# EAGLE board pcb_univ_3-(1-3-5)-x-x-rev2 (EAGLE 5.11)
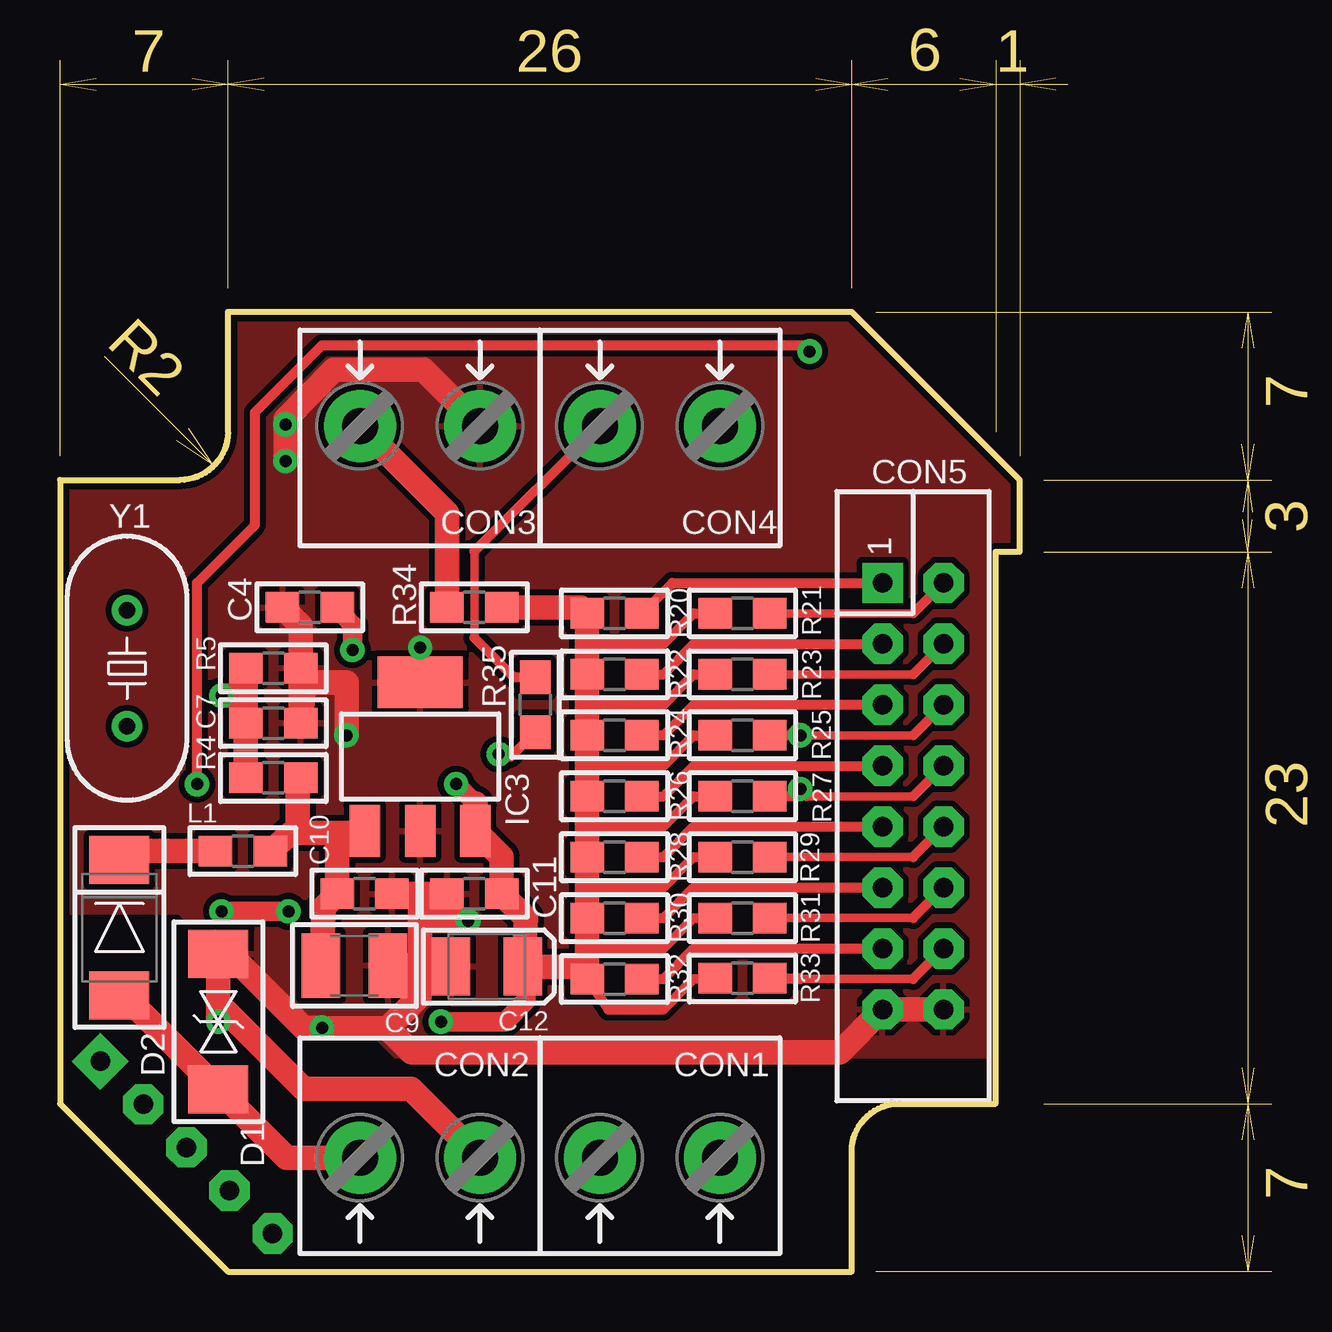
[diagram p0: board, top side]
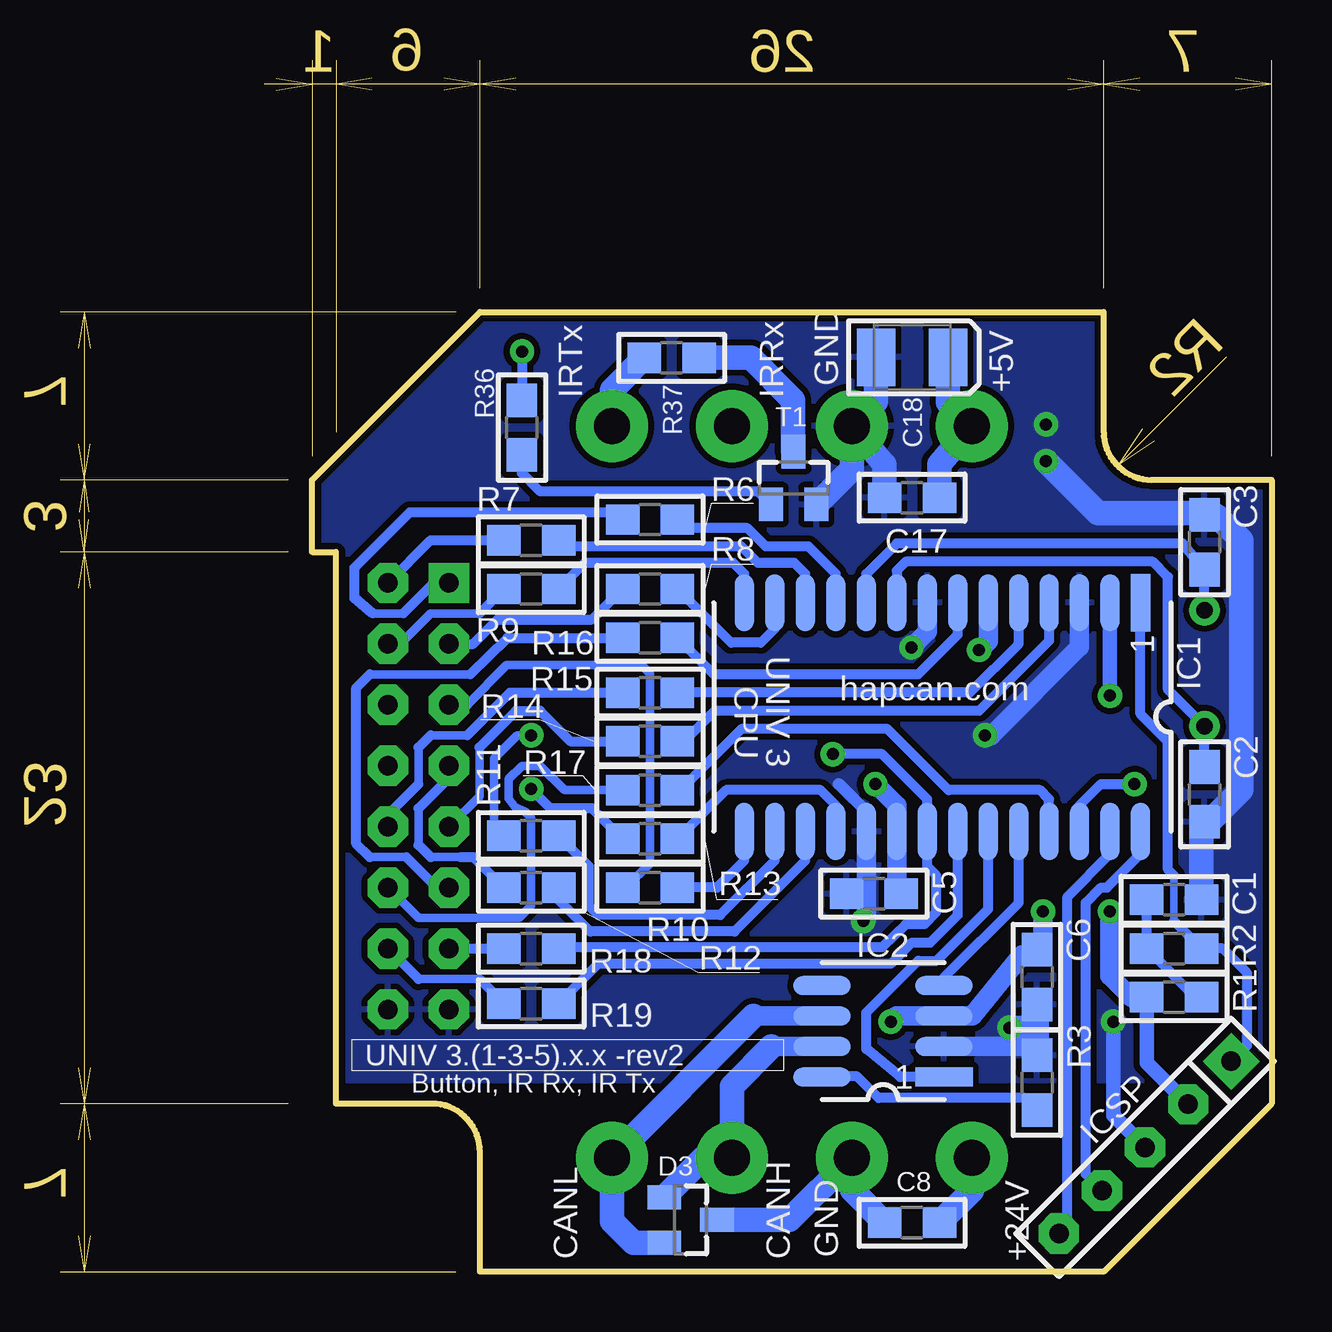
[diagram p1: board, bottom side, seen from below]

Size 50.5 x 50.5 mm. Coordinates in mm from the lower left corner, seen from the top.
Outline: 6.37,33.63 1.86,38.13
Outline: 6.37,33.63 4.87,34.63
Outline: 6.37,33.63 5.37,35.13
Outline: 0,34 0,49.5
Outline: 0,49.5 0,50.5
Outline: 0,49.5 39,49.5
Outline: 39,49.5 40,49.5
Outline: 40,50.5 40,49.5
Outline: 40,49.5 40,34
Outline: 33,41 33,50.5
Outline: 7,41 7,50.5
Outline: 0,49.5 1.5,49.75
Outline: 0,49.5 1.5,49.25
Outline: 8.5,49.75 5.5,49.25
Outline: 5.5,49.75 8.5,49.25
Outline: 31.5,49.25 34.5,49.75
Outline: 31.5,49.75 34.5,49.25
Outline: 34,40 49.5,40
Outline: 49.5,40 50.5,40
Outline: 49.5,40 49.5,33
Outline: 49.5,33 49.5,30
Outline: 49.5,30 49.5,0
Outline: 50.5,0 49.5,0
Outline: 49.5,0 34,0
Outline: 41,7 50.5,7
Outline: 41,33 49.5,33
Outline: 49.5,33 50.5,33
Outline: 49.5,40 49.75,38.5
Outline: 49.5,40 49.25,38.5
Outline: 49.5,33 49.25,34.5
Outline: 49.75,34.5 49.5,33
Outline: 49.25,8.5 49.75,5.5
Outline: 49.75,8.5 49.25,5.5
Outline: 49.25,1.5 49.5,0
Outline: 49.75,1.5 49.5,0
Outline: 41,30 49.5,30
Outline: 49.5,30 50.5,30
Outline: 49.5,30 49.75,28.5
Outline: 49.5,30 49.25,28.5
Outline: 49.5,33 49.3,31.65
Outline: 49.5,33 49.7,31.65
Outline: 49.5,30 49.7,31.35
Outline: 49.5,30 49.3,31.35
Outline: 39,50.5 39,49.5
Outline: 39,49.5 39,35
Outline: 37.5,49.75 39,49.5
Outline: 37.5,49.25 39,49.5
Outline: 40,49.5 42,49.5
Outline: 41.5,49.75 40,49.5
Outline: 41.5,49.25 40,49.5
Outline: 40,30 40,33 33,40 7,40 7,35 arc-90 5,33 0,33 0,7 7,0 33,0 33,5 arc-90 35,7 39,7 39,30 40,30
Copper layers (1*16): Top 0.035mm / dielectric 1.5mm / Bottom 0.035mm
Design rules "hapcan_drc *": minimum track width 10mil, minimum drill 0.5mm, track to track 10mil, track to pad 10mil, pad to pad 10mil, via to via 10mil, smd to smd 0mil, copper to edge 10mil, drill to drill 8mil, minimum pad ring 10mil, minimum via ring 10mil, stop-mask expansion 4mil, vias tented up to drill 0mil, thermal gap 10mil

## Footprints (pad centres in the part's own frame; a part is rotated, then mirrored left to right if it is on the bottom)
CONNECTOR-16PIN = drill 0.813 pad 1.676 square: 1 -8.89,-1.27 | drill 0.813 pad 1.676 octagon: 2 -8.89,1.27; 3 -6.35,-1.27; 4 -6.35,1.27; 5 -3.81,-1.27; 6 -3.81,1.27; 7 -1.27,-1.27; 8 -1.27,1.27; 9 1.27,-1.27; 10 1.27,1.27; 11 3.81,-1.27; 12 3.81,1.27; 13 6.35,-1.27; 14 6.35,1.27; 15 8.89,-1.27; 16 8.89,1.27
0805 = smd 1.397 x 1.27: 1 -1.143,0; 2 1.143,0
1210 = smd 1.6 x 2.7: 1 -1.4,0; 2 1.4,0
SMC_B = smd 1.6 x 2.4: + -1.5,0; - 1.5,0
ARK2-9MM = drill 1.5 pad 3 round: 1 -2.5,0; 2 2.5,0
DO-214_TRANSIL2@1 = smd 2 x 2.5: A 2.82,0; C -2.82,0
DO-214 = smd 2 x 2.5: A 2.82,0; C -2.82,0
SOT-23 = smd 1 x 1.4: 1 -0.95,-1.1; 2 0.95,-1.1; 3 0,1.1
UNIV3CPU = smd 2.4 x 0.8: 1 -4.763,8.255; 2 -4.763,6.985; 3 -4.763,5.715; 4 -4.763,4.445; 5 -4.763,3.175; 6 -4.763,1.905; 7 -4.763,0.635; 8 -4.763,-0.635; 9 -4.763,-1.905; 10 -4.763,-3.175; 11 -4.763,-4.445; 12 -4.763,-5.715; 13 -4.763,-6.985; 14 -4.763,-8.255; 15 4.763,-8.255; 16 4.763,-6.985; 17 4.763,-5.715; 18 4.763,-4.445; 19 4.763,-3.175; 20 4.763,-1.905; 21 4.763,-0.635; 22 4.763,0.635; 23 4.763,1.905; 24 4.763,3.175; 25 4.763,4.445; 26 4.763,5.715; 27 4.763,6.985; 28 4.763,8.255
SO-08 = smd 2.4 x 0.8: 1 -2.54,1.905; 2 -2.54,0.635; 3 -2.54,-0.635; 4 -2.54,-1.905; 5 2.54,-1.905; 6 2.54,-0.635; 7 2.54,0.635; 8 2.54,1.905
SOT-223 = smd 1.27 x 2.159: 1 -2.311,-3.099; 2 0,-3.099; 3 2.311,-3.099 | smd 3.556 x 2.159: 4 0,3.099
SIP-5 = drill 0.813 pad 1.676 square: 1 -5.08,0 | drill 0.813 pad 1.676 octagon: 2 -2.54,0; 3 0,0; 4 2.54,0; 5 5.08,0
HC49/S = drill 0.7 pad 1.27 round: 1 -2.413,0; 2 2.413,0

## Placement (x,y rotation side)
-  CONNECTOR-16PIN  [CONNECTOR-16PIN]  35.56,19.81 270 top
C1  100n  [0805]  4.06,15.49 0 bottom
C2  22p  [0805]  2.79,19.89 270 bottom
C3  22p  [0805]  2.79,30.4 90 bottom
C4  10u/6V  [0805]  10.41,27.69 180 top
C5  100n  [0805]  16.57,15.75 180 bottom
C6  100n  [0805]  9.78,12.27 270 bottom
C7  100n  [0805]  8.89,22.86 0 top
C8  100n  [0805]  14.99,2.03 180 bottom
C9  10u/50V  [1210]  12.27,12.75 0 top
C10  100n  [0805]  12.7,15.75 0 top
C11  100n  [0805]  17.27,15.75 180 top
C12  10u/6V  [SMC_B]  17.79,12.72 180 top
C17  100n  [0805]  14.99,32.26 180 bottom
C18  4u7/6V  [SMC_B]  14.98,38.11 180 bottom
CON1  TERMINAL-2  [ARK2-9MM]  25,4.75 180 top
CON2  TERMINAL-2  [ARK2-9MM]  15,4.75 180 top
CON3  TERMINAL-2  [ARK2-9MM]  15,35.25 0 top
CON4  TERMINAL-2  [ARK2-9MM]  25,35.25 0 top
D1  P6SMB33CA  [DO-214_TRANSIL2@1]  6.6,10.41 270 top
D2  S1D  [DO-214]  2.48,14.33 270 top
D3  PESD2CAN  [SOT-23]  24.22,2.15 270 bottom
IC1  UNIV 3 (CPU)  [UNIV3CPU]  13.72,23.11 270 bottom
IC2  MCP2551  [SO-08]  16.19,10.01 180 bottom
IC3  MCP1790  [SOT-223]  15.01,21.46 0 top
ICSP  [SIP-5]  5.27,5.17 225 bottom
L1  BLM21A102SPT  [0805]  7.62,17.53 180 top
R1  10k  [0805]  4.06,11.43 0 bottom
R2  470R  [0805]  4.06,13.46 0 bottom
R3  4k7  [0805]  9.78,7.87 270 bottom
R4  51k 1%  [0805]  8.89,20.57 180 top
R5  10k 1%  [0805]  8.89,25.15 180 top
R6  470R  [0805]  25.91,31.34 180 bottom
R7  470R  [0805]  30.86,30.48 180 bottom
R8  470R  [0805]  25.91,28.45 180 bottom
R9  470R  [0805]  30.86,28.45 180 bottom
R10  470R  [0805]  25.91,16 180 bottom
R11  470R  [0805]  30.86,18.16 180 bottom
R12  470R  [0805]  30.86,16 180 bottom
R13  470R  [0805]  25.91,18.03 180 bottom
R14  470R  [0805]  25.91,22.1 180 bottom
R15  470R  [0805]  25.91,24.13 180 bottom
R16  470R  [0805]  25.91,26.42 180 bottom
R17  470R  [0805]  25.91,20.07 180 bottom
R18  470R / **R  [0805]  30.86,13.46 180 bottom
R19  470R / 0R  [0805]  30.86,11.18 180 bottom
R20  10k  [0805]  23.11,27.43 0 top
R21  10k  [0805]  28.45,27.43 0 top
R22  10k  [0805]  23.11,24.89 0 top
R23  10k  [0805]  28.45,24.89 0 top
R24  10k  [0805]  23.11,22.35 0 top
R25  10k  [0805]  28.45,22.35 0 top
R26  10k  [0805]  23.11,19.81 0 top
R27  10k  [0805]  28.45,19.81 0 top
R28  10k  [0805]  23.11,17.27 0 top
R29  10k  [0805]  28.45,17.27 0 top
R30  10k  [0805]  23.11,14.73 0 top
R31  10k  [0805]  28.45,14.73 0 top
R32  10k / **R  [0805]  23.11,12.19 0 top
R33  10k / 2k2  [0805]  28.45,12.22 0 top
R34  100R  [0805]  17.27,27.69 180 top
R35  0R / **R  [0805]  19.81,23.62 90 top
R36  470R  [0805]  31.24,35.18 270 bottom
R37  0R  [0805]  25.01,38.08 180 bottom
T1  BC817C  [SOT-23]  19.92,33.08 0 bottom
Y1  8MHz  [HC49/S]  2.79,25.15 90 top

## Library data of the parts
- C1-C12 C17 C18 CON1-CON4 D1-D3 IC1-IC3 ICSP L1 R1-R37 T1 Y1 = HAPCAN_devices - UNIV3

## Nets
+5V: C5.1 C6.1 C11.1 C12.+ IC1.20 IC2.3 IC3.3 ICSP.2 R1.1 R20.1 R21.1 R22.1 R23.1 R24.1 R25.1 R26.1 R27.1 R28.1 R29.1 R30.1 R31.1 R32.1 R33.1 R34.1
GND: -.15 -.16 C1.2 C2.2 C3.2 C4.2 C5.2 C6.2 C7.2 C8.2 C9.2 C10.2 C11.2 C12.- C17.2 C18.- CON2.1 CON3.2 D1.C D3.3 IC1.3 IC1.8 IC1.19 IC2.2 IC3.2 IC3.4 ICSP.3 R3.1 R5.1 T1.2
N$1: IC1.26 R36.1
N$2: IC1.24 IC2.4
N$3: IC1.23 IC2.1
N$4: CON4.2 R37.2
N$5: -.1 R6.2 R20.2
N$6: -.3 R8.2 R22.2
N$7: C1.1 R1.2 R2.1
N$8: IC1.1 ICSP.1 R2.2
N$9: CON1.2 D3.1 IC2.7
N$10: IC1.28 ICSP.4
N$11: IC1.22 R19.1
N$12: IC2.8 R3.2
N$13: -.9 R14.2 R28.2
N$14: IC1.27 ICSP.5
N$15: C3.1 IC1.10 Y1.2
N$16: C7.1 IC1.2 R4.2 R5.2
N$17: C9.1 C10.1 IC3.1 L1.1 R4.1
N$18: IC1.21 R18.1 R35.1
N$19: -.2 R7.2 R21.2
N$20: IC1.25 R17.1
N$21: -.4 R9.2 R23.2
N$22: IC1.14 R9.1
N$23: -.6 R11.2 R25.2
N$24: -.7 R12.2 R26.2
N$25: IC1.11 R6.1
N$26: IC1.12 R7.1
N$27: IC1.13 R8.1
N$28: -.10 R15.2 R29.2
N$29: IC1.15 R10.1
N$30: IC1.7 R16.1
N$31: -.5 R10.2 R24.2
N$32: -.8 R13.2 R27.2
N$33: IC1.5 R15.1
N$34: IC1.4 R14.1
N$35: R37.1 T1.3
N$36: -.11 R16.2 R30.2
N$37: C17.1 C18.+ CON3.1 R34.2
N$38: -.12 R17.2 R31.2
N$40: C2.1 IC1.9 Y1.1
N$41: -.14 R19.2 R33.2
N$42: CON1.1 D3.2 IC2.6
N$43: R36.2 T1.1
N$44: CON4.1 R35.2
N$45: IC1.16 R11.1
N$46: IC1.17 R12.1
N$47: IC1.18 R13.1
N$48: -.13 R18.2 R32.2
N$56: C4.1 IC1.6
N$64: C8.1 CON2.2 D1.A D2.A
N$67: D2.C L1.2

## Tracks (layer width: path | path; a pad name or v marks a point on that pad's centre or on a via)
+5V  (via drill 0.5 pad 1.02)
  Top 0.406: R21.1 26.42,27.43 25.15,26.16 21.97,26.16 | R23.1 26.42,24.89 25.15,23.62 21.97,23.62 | R25.1 26.42,22.35 25.15,21.08 21.97,21.08 | R27.1 26.42,19.81 25.15,18.54 21.97,18.54 | R29.1 26.42,17.27 25.15,16 21.97,16 | R31.1 26.42,14.73 25.15,13.46 21.97,13.46 | R33.1 26.42,12.19 25.15,10.92 22.86,10.92 R32.1
  Top 0.813: v15.88,10.41 18.54,10.41 19.43,11.3 19.43,12.7 C12.+ | 17.32,19.51 v16.51,20.32 | v6.73,15.01 v9.53,15.01 | IC3.3 17.32,19.51
  Top 1.016: C12.+ 19.42,14.74 C11.1 18.41,17.27 IC3.3 | R34.1 21.72,27.69 R20.1 21.97,26.16 R22.1 21.97,23.62 R24.1 21.97,21.08 R26.1 21.97,18.54 R28.1 21.97,16 R30.1 21.97,13.46 R32.1 21.97,12.7 19.43,12.7 | 17.32,19.51
  Bottom 0.406: 15.62,15.74 C5.1 | R1.1 5.84,11.43
  Bottom 0.61: ICSP.2 5.21,8.7 R1.1
  Bottom 0.813: 15.62,15.74 IC1.20 15.62,19.43 v16.51,20.32 | v15.88,10.41 15.64,10.65 IC2.3 12.46,10.65 10.41,13.21 9.96,13.21 C6.1 | v6.73,15.01 6.73,12.32 5.84,11.43 | C6.1 9.75,13.36 | v9.53,15.01 9.53,13.64 C6.1
GND  (via drill 0.5 pad 0.81, 0.5 pad 1.02)
  Top 0.406: 6.63,13.21 7.11,13.21
  Top 0.813: 15.01,14.48 15.07,14.54
  Top 1.016: CON2.1 14.63,7.62 10.16,7.62 6.6,11.18 | 14.99,12.75 C9.2 | 14.99,12.75 16.36,12.75 C12.- | C10.2 C11.2 15.26,15.75 arc90 15.01,15.49 15.01,14.48 15.01,12.78 14.99,12.75 | 6.83,13.23 D1.C 6.6,13.18 | CON3.2 15.16,37.59 11.43,37.59 9.4,35.53 v9.4,35.31 v9.4,33.78 | v15.01,26.01 | 14.99,12.75 14.99,11.47 13.65,10.14 | 13.65,10.14 14.65,9.14 32.51,9.14 -.15 -.16 | 7.11,13.21 10.18,10.14 | 10.18,10.14 13.65,10.14 | 10.18,10.14 10.2,10.16 v10.92,10.16 | 6.6,13.18 6.63,13.21 | v6.6,10.41 6.6,11.18 | 6.6,11.18 6.6,13.18 | v17.02,14.61 15.14,14.61 arc90 15.07,14.54 | v11.94,22.35 11.94,24.55 10.2,24.55 C7.2 R5.1 10.03,26.92 C4.2
  Bottom 0.406: IC1.19 16.89,19.18
  Bottom 0.508: 16.89,19.18 18.03,20.32
  Bottom 0.61: v6.6,10.41 6.6,6.51 ICSP.3
  Bottom 0.813: IC1.8 14.35,26.67 v15.01,26.01 | 9.8,9.38 IC2.2 | v17.02,14.61 arc90 16.89,14.73 16.89,15.75 | 16.89,15.75 IC1.19 | 16.89,15.75 C5.2 | v11.94,22.35 11.68,22.35 8,26.04 IC1.3
  Bottom 1.016: C3.2 2.74,31.5 2.29,31.5 1.27,30.48 1.27,20.07 2.59,18.75 C2.2 2.92,18.62 C1.2 | C18.- 16.48,36.27 CON3.2 | CON3.2 16.13,33.63 C17.2 | T1.2 17.5,33.45 CON3.2 | 9.78,10.16 R3.1 | 9.78,10.16 C6.2 | v10.92,10.16 9.78,10.16 | 9.78,10.16 9.8,9.38 | C8.2 17.5,3.4 CON2.1 20.1,2.15 D3.3 | v9.4,33.78 7.24,31.62 2.92,31.62
  pour Top: 7,40 33,40 40,33 40,30 39,30 39,9 14,9 13,10 10,10 5,15 0,15 0,33 6,33 7,34
  pour Bottom: 7,40 33,40 40,33 40,30 39,30 39,8 0,8 0,33 6,33 7,34
N$1  (via drill 0.5 pad 1.02)
  Top 0.406: v5.71,20.32 5.71,28.7 8.13,31.11 8.13,35.81 10.92,38.61 30.98,38.61 v31.24,38.35
  Bottom 0.406: IC1.26 8,19.43 7.11,20.32 v5.71,20.32 | v31.24,38.35 R36.1
N$2
  Bottom 0.406: IC2.4 13.23,11.92 | IC2.4 13.48,11.92 | IC1.24 10.54,15.37 13.65,12.25 IC2.4
N$3
  Bottom 0.406: IC2.1 15.47,8.11 16.89,9.27 16.89,10.79 14.73,12.95 13.97,12.95 11.81,15.11 IC1.23
N$4
  Bottom 1.016: R37.2 27.5,36.73 CON4.2
N$5
  Top 0.406: R20.2 25.53,28.7 -.1
  Bottom 0.356: 36.2,27.43 37.47,27.43
  Bottom 0.406: 37.47,27.43 38.23,28.07 38.23,29.34 35.92,31.65 27.36,31.65 R6.2 | 36.2,27.43 34.92,28.7 -.1
N$6
  Top 0.406: R22.2 25.15,24.89 26.42,26.16 -.3
  Bottom 0.406: R8.2 28.32,27.18 32.26,27.18 33.27,26.16 -.3
N$7
  Bottom 0.406: R1.2 3.17,11.43 R2.1 C1.1
N$8
  Bottom 0.305: 4.06,14.61 4.06,16.51
  Bottom 0.406: ICSP.1 1.02,9.43 1.02,12.45 2.03,13.46 R2.2 4.06,14.61 | IC1.1 5.46,23.24 4.32,22.1 4.32,16.76 4.06,16.51
N$9
  Bottom 0.813: 20.85,9.38 IC2.7
  Bottom 1.016: D3.1 23.67,4.75 CON1.2 22.5,7.73 20.85,9.38
N$10
  Bottom 0.406: IC1.28 5.46,17.4 6.86,16 7.11,16 7.75,15.37 7.75,4.06 ICSP.4
N$11
  Bottom 0.406: R19.1 28.07,12.83 15.88,12.83 14.99,13.72 14.22,13.72 13.08,14.86 IC1.22
N$12
  Bottom 0.406: IC2.8 18.71,8.13 17.27,8.13 16.38,7.24 10.29,7.24 R3.2
N$13
  Top 0.406: R28.2 25.15,17.27 26.42,18.54 -.9
  Bottom 0.356: 33.02,21.84 33.02,19.81 -.9
  Bottom 0.406: 33.02,21.84 31.5,23.37 30.48,23.37 29.21,22.1 R14.2
N$14
  Bottom 0.406: IC1.27 6.73,17.4 8.51,15.62 8.51,2.03 8.86,1.68 ICSP.5
N$15
  Bottom 0.406: Y1.2 2.81,27.56 C3.1 3.7,30.35 15.62,30.35 16.89,29.08 IC1.10
N$16  (via drill 0.5 pad 1.02)
  Top 1.016: R4.2 C7.1 7.75,24 | 7.75,24 R5.2 | 7.75,24 v6.73,24
  Bottom 0.61: v6.73,24 IC1.2
N$17
  Top 1.016: L1.1 9.65,18.29 9.91,18.29 | C9.1 11,15.19 C10.1 11.56,18.29 | 11.56,18.29 9.91,18.29 | R4.1 9.91,20.57 9.91,18.29 | 11.56,18.29 12.62,18.29 IC3.1
N$18  (via drill 0.5 pad 1.02)
  Top 0.406: R35.1 18.8,21.46 v18.29,21.57
  Bottom 0.406: v18.29,21.57 16.23,21.57 14.35,19.68 IC1.21 14.35,16.89 13.97,16.51 13.97,14.99 14.48,14.48 15.24,14.48 16.23,13.51 29.67,13.51 R18.1
N$19
  Top 0.356: R21.2 35.56,27.43
  Top 0.406: 35.56,27.43 -.2
  Bottom 0.406: 32.13,30.1 R7.2 35.05,30.48 -.2
N$20
  Bottom 0.406: IC1.25 9.27,19.68 9.65,20.07 13.46,20.07 16,22.61 22.1,22.61 24.38,20.32 R17.1
N$21
  Top 0.356: R23.2 35.56,24.89
  Top 0.406: 35.56,24.89 -.4
  Bottom 0.356: 36.32,26.16 35.05,27.43 33.02,27.43
  Bottom 0.406: -.4 36.32,26.16 | 33.02,27.43 R9.2
N$22
  Bottom 0.406: IC1.14 21.97,29.08 22.43,29.54 28.63,29.54 R9.1
N$23  (via drill 0.5 pad 1.02)
  Top 0.356: v30.86,22.35 35.56,22.35
  Top 0.406: 35.56,22.35 -.6 | v30.86,22.35 R25.2
  Bottom 0.356: 32.41,18.16 32.41,21.39 31.45,22.35 v30.86,22.35
  Bottom 0.406: R11.2 32.41,18.16
N$24
  Top 0.406: R26.2 25.15,19.81 26.42,21.08 -.7
  Bottom 0.356: 35.05,17.27 33.78,17.27 | 35.56,19.3 35.56,17.78
  Bottom 0.406: 35.56,17.78 35.05,17.27 | 35.56,19.3 34.29,20.57 -.7 | 33.78,17.27 33.27,17.27 R12.2
N$25
  Bottom 0.406: IC1.11 18.16,29.08 19.3,30.23 21.08,30.23 21.84,30.99 24.41,30.99 R6.1
N$26
  Bottom 0.406: IC1.12 19.43,29.08 19.89,29.54 21.41,29.54 22.1,30.23 29.46,30.23 R7.1
N$27
  Bottom 0.406: IC1.13 20.7,26.8 21.29,26.21 22.53,26.21 R8.1
N$28
  Top 0.356: R29.2 35.56,17.27
  Top 0.406: 35.56,17.27 -.10
  Bottom 0.356: 35.05,22.35 33.53,22.35 | 35.56,20.32 35.56,21.84
  Bottom 0.406: 35.56,21.84 35.05,22.35 | 35.56,20.32 36.83,19.05 -.10 | R15.2 31.75,24.13 33.53,22.35
N$29
  Bottom 0.406: IC1.15 21.97,17.14 23.11,16 R10.1
N$30
  Bottom 0.406: IC1.7 13.08,26.54 14.73,24.89 23.24,24.89 R16.1
N$31
  Top 0.406: R24.2 25.15,22.35 26.42,23.62 -.5
  Bottom 0.356: 26.92,16 25.91,17.02 25.91,24.92 26.26,25.27 31.88,25.27 33.53,23.62
  Bottom 0.406: R10.2 26.92,16 | 33.53,23.62 -.5
N$32  (via drill 0.5 pad 1.02)
  Top 0.356: 31.11,19.81 35.56,19.81
  Top 0.406: 35.56,19.81 -.8 | R27.2 30.61,19.81 v30.86,20.12 31.11,19.81
  Bottom 0.406: v30.86,20.12 30.05,19.3 28.32,19.3 R13.2
N$33
  Bottom 0.406: IC1.5 10.54,26.16 12.57,24.13 R15.1
N$34
  Bottom 0.406: IC1.4 9.27,26.29 12.19,23.37 23.22,23.37 24.49,22.1 R14.1
N$35
  Bottom 1.016: T1.3 19.94,34.19 19.94,36.32 21.7,38.08 R37.1
N$36
  Top 0.406: R30.2 25.15,14.73 26.42,16 -.11
  Bottom 0.356: 36.07,17.27 37.59,17.27 | 37.59,24.89 33.4,24.89
  Bottom 0.406: 37.59,24.89 38.15,24.33 38.15,17.83 37.59,17.27 | 36.07,17.27 34.8,16 -.11 | R16.2 31.85,26.42 33.4,24.89
N$37
  Top 1.016: CON3.1 16.13,31.62 R34.2
  Bottom 1.016: C18.+ 13.48,36.23 CON3.1 13.84,33.66 C17.1
N$38
  Top 0.356: R31.2 35.56,14.73
  Top 0.406: 35.56,14.73 -.12
  Bottom 0.356: -.12 35.56,14.73 31.37,14.73 30.86,15.24 30.86,18.92 31.11,19.18 31.55,19.38 31.8,19.71 31.8,20.52 31.24,21.08 30.48,21.08 29.46,20.07 R17.2
N$40
  Bottom 0.406: 2.79,20.91 C2.1 Y1.1 4.32,24.26 4.32,28.96 4.95,29.59 15.24,29.59 15.62,29.21 IC1.9
N$41
  Top 0.356: 30.86,12.19 35.56,12.19
  Top 0.406: 35.56,12.19 -.14 | 30.86,12.19 30.83,12.22 R33.2
  Bottom 0.356: 35.56,12.19 33.02,12.19
  Bottom 0.406: -.14 35.56,12.19 | 33.02,12.19 R19.2
N$42
  Bottom 0.813: 21.6,10.65 IC2.6
  Bottom 1.016: 21.6,10.65 CON1.1 27.5,2.1 26.6,1.2 D3.2
N$43
  Bottom 0.406: R36.2 31.24,33.27 30.48,32.51 21.41,32.51 T1.1
N$44
  Top 0.356: 17.27,26.42 17.27,30.02
  Top 0.406: R35.2 18.92,24.77 17.27,26.42 | 17.27,30.02 CON4.1
N$45
  Bottom 0.406: R11.1 28.45,16.89 28.45,15.24 28.07,14.86 22.99,14.86 20.7,17.14 IC1.16
N$46
  Bottom 0.356: 29.72,15.49 R12.1 | 19.43,17.14 IC1.17
  Bottom 0.406: 29.72,15.49 28.4,14.17 22.38,14.17 19.43,17.14
N$47
  Bottom 0.406: IC1.18 18.16,19.43 18.8,20.07 22.73,20.07 R13.1
N$48
  Top 0.406: R32.2 25.15,12.19 26.42,13.46 -.13
  Bottom 0.406: -.13 R18.2
N$56  (via drill 0.5 pad 1.02)
  Top 0.813: C4.1 12.2,26.92 v12.19,25.91
  Bottom 0.813: IC1.6 11.81,26.29 v12.19,25.91
N$64
  Top 1.016: CON2.2 9.45,4.75 D1.A 2.68,11.51 D2.A
  Bottom 1.016: CON2.2 12.5,3.37 C8.1
N$67
  Top 1.016: L1.2 2.48,17.53 D2.C

## Text on the board
Dimension: 7 | 26 | 6 | 1 | R2 | 7 | 3 | 23 | 7
tNames: CON5
bNames: +5V | GND | IRRx | IRTx | hapcan.com | UNIV 3.(1-3-5).x.x -rev2 | Button, IR Rx, IR Tx | GND | CANH | CANL | +24V